# Altium PCB Controlador_Digital.PcbDoc
Units mil, origin at the board's own origin, x right, y up, seen from the top; angles counter-clockwise.
Board outline 2120 x 1800 mil, 2 copper layers (Top Layer, Bottom Layer); 15 components, 14 nets, 48 pads, 0 vias.
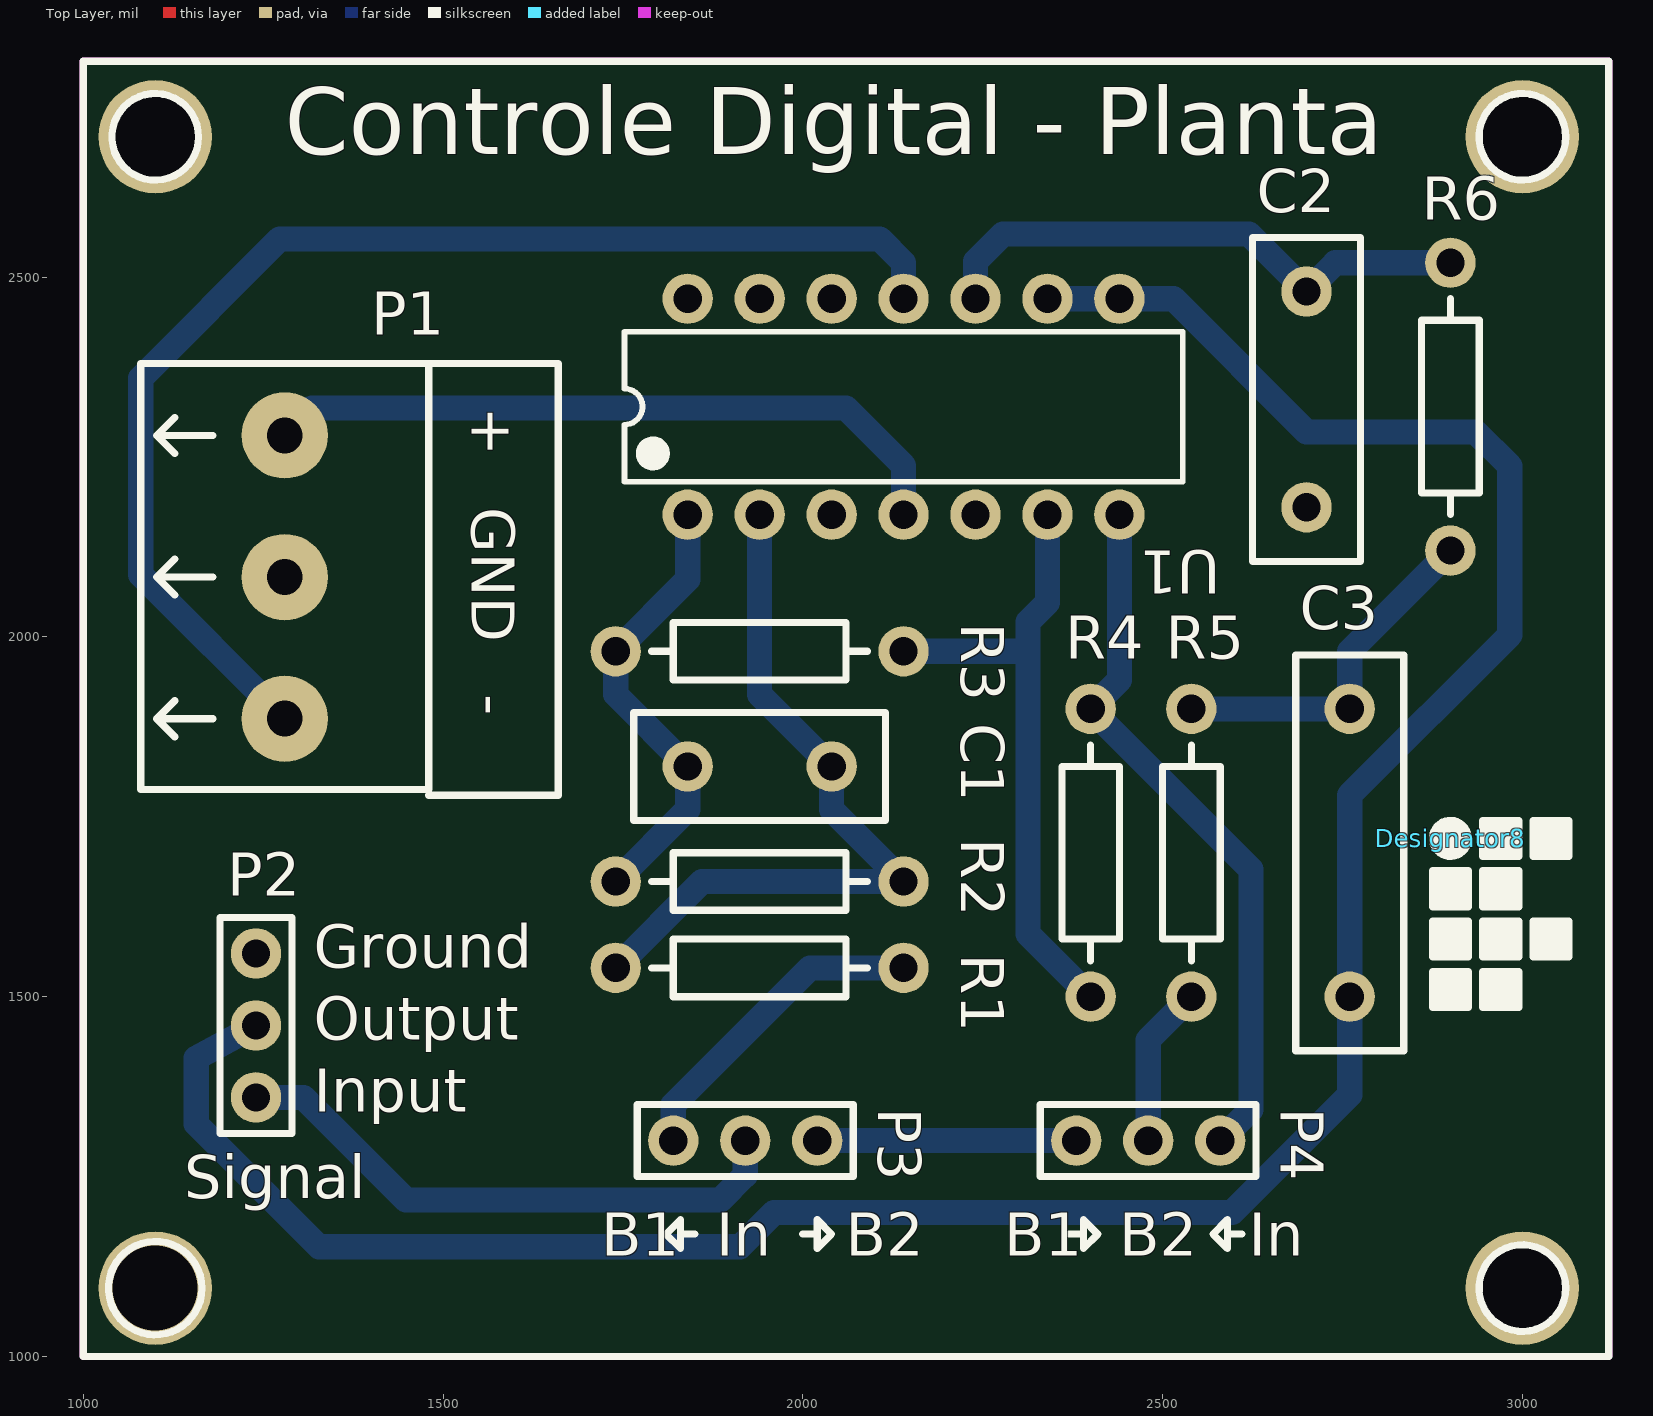
[diagram p0: Top Layer view]
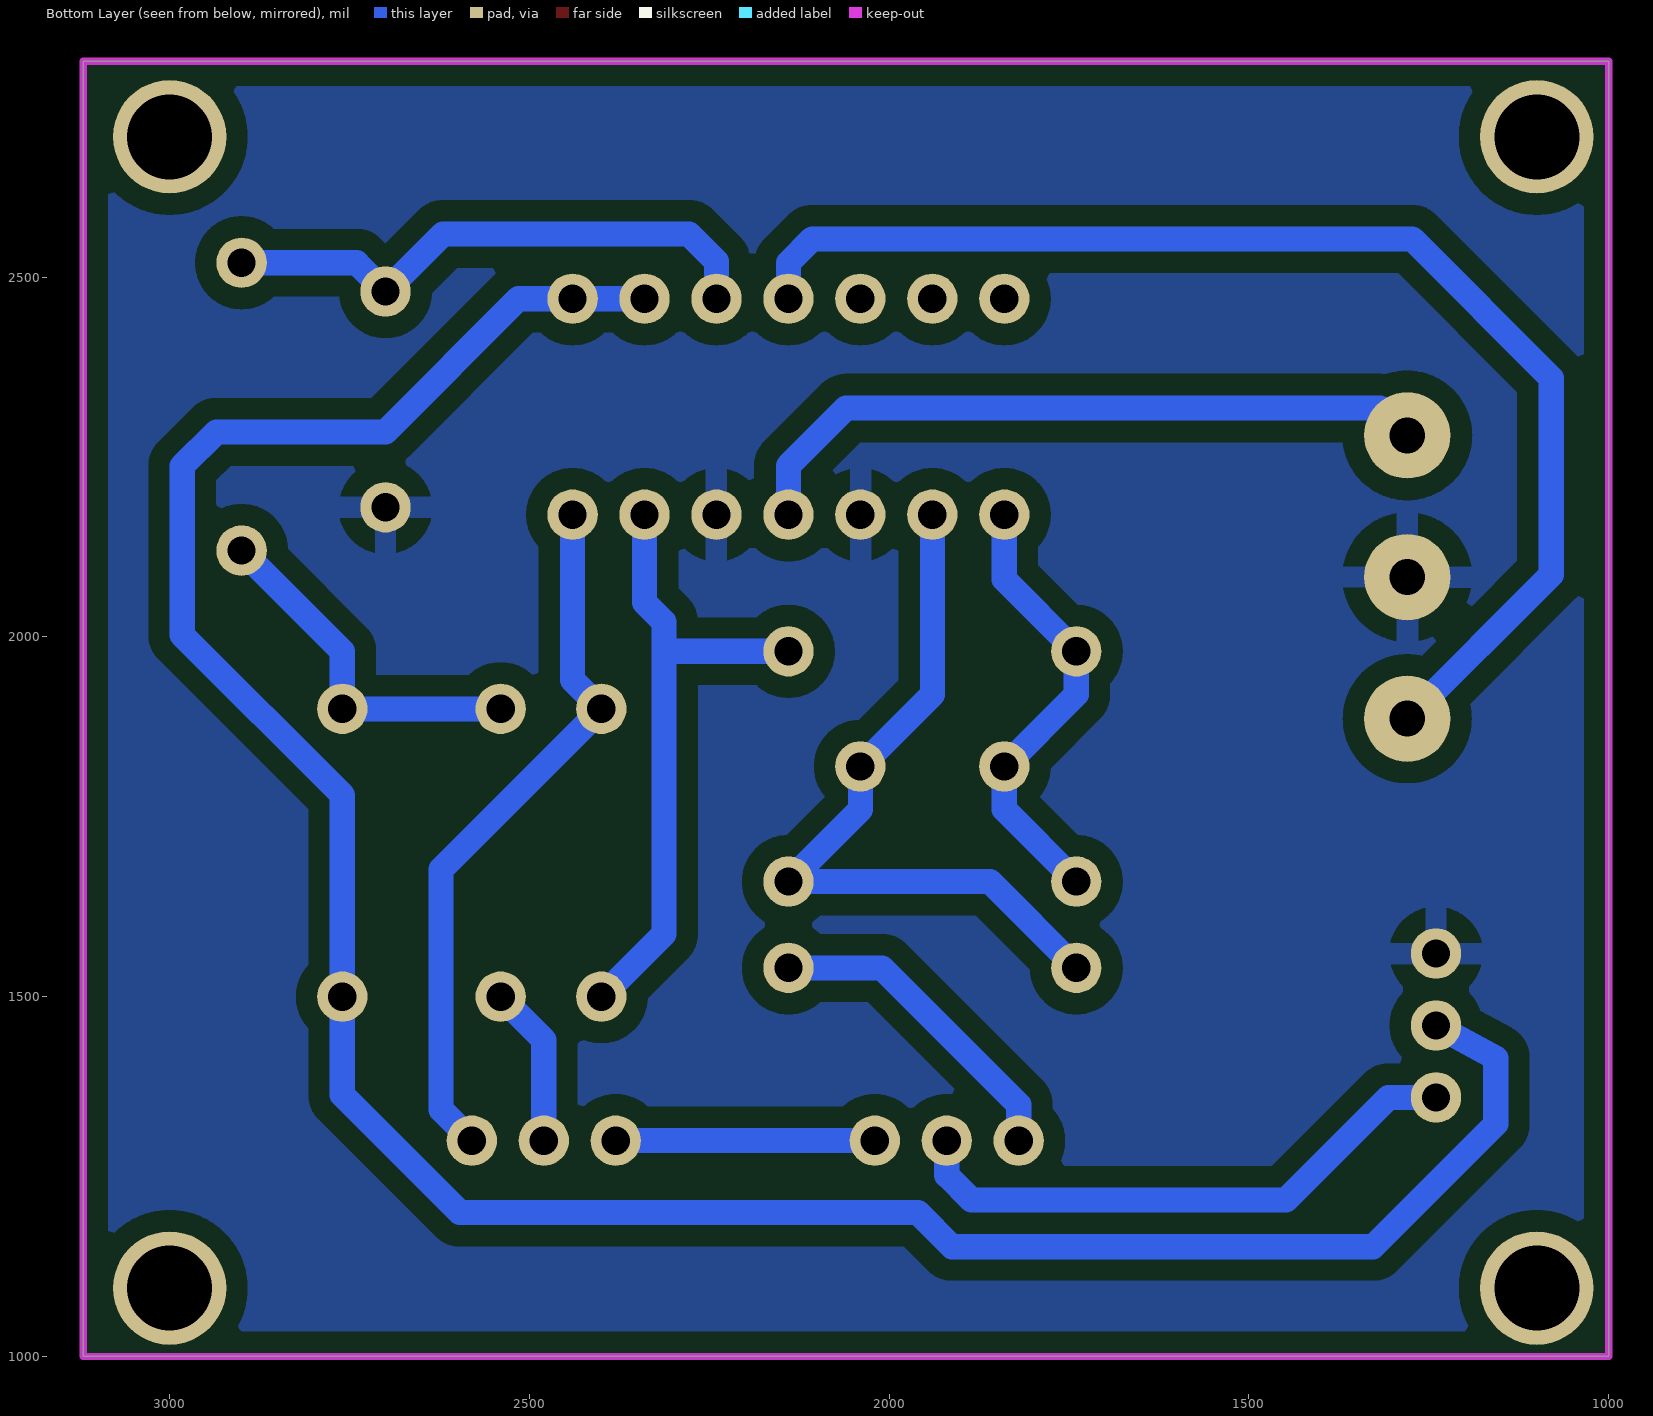
[diagram p1: Bottom Layer view, seen from below]
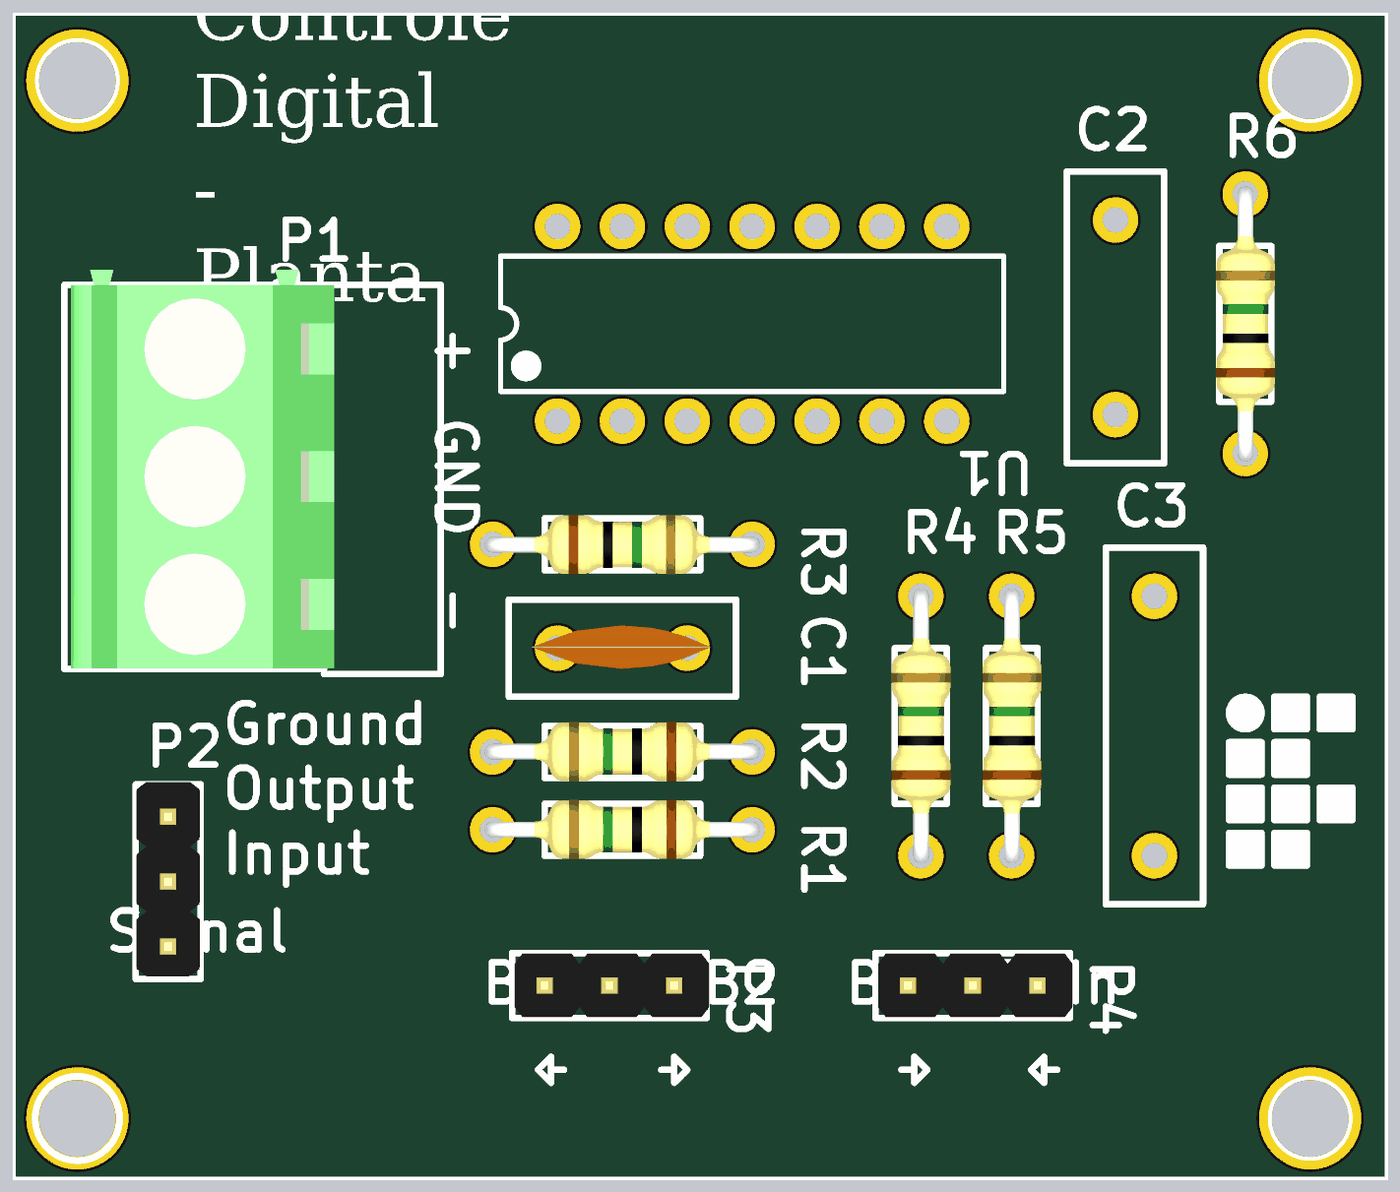
[diagram p2: 3D render of the assembled board from above, using the file's embedded part models]

## Layer stack, top to bottom
Top Solder: solder mask 0.4, Solder Resist, Dk 3.5
Top Layer: signal copper 1.4
Dielectric 1: dielectric 12.6, FR-4, Dk 4.8
Bottom Layer: signal copper 1.4
Bottom Solder: solder mask 0.4, Solder Resist, Dk 3.5

## Board outline
1000,1000 3120,1000 3120,2800 1000,2800

## Design rules (kind name [scope] priority, off if disabled: settings)
Clearance [All] p1: gap=30
PlaneConnect [All] p1: planeconnectstyle=Relief reliefexpansion=30 reliefentries=4 reliefconductorwidth=30 reliefairgap=30
PolygonConnect [All] p1: connectstyle=Relief reliefconductorwidth=30 reliefentries=4 polygonreliefangle="90 Angle" airgapwidth=30
RoutingLayers [All] p1: top layer_v5=FALSE bottom layer_v5=TRUE
RoutingVias [All] p1: holewidth=28 width=50 viastyle="Through Hole" minholewidth=28 minwidth=50 maxholewidth=28 maxwidth=50
SolderMaskExpansion [All] p1: expansion=4
Width [All] p1: maxlimit=35 minlimit=35 preferedwidth=35
28 further rules are at their usual default settings.

## Classes and differential pairs
component class Controlador_Digital: C1 C2 C3 P1 P2 P3 P4 R1 R2 R3 R4 R5 R6 U1

## Components (designator, comment, footprint, x,y, rotation, side; value= is the part's Value field where it differs from the comment)
C1 "150pF" C200-350-150 1840,1820 r0 top
C2 "100nF" C300-450-150 2700,2180 r90 top
C3 "680nF" C400-550-150 2760,1500 r90 top
Designator8 "Comment" IFSC_SILK_SMALL 2900,1720 r0 top
P1 "Terminal" KRE_3 1280,2280 r270 top
P2 "Header_1x3" HDR-M-1x3-2.54mm-180-9.2mm 1240,1360 r90 top
P3 "Header_1x3" HDR-M-1x3-2.54mm-180-9.2mm 1820,1300 r0 top
P4 "Header_1x3" HDR-M-1x3-2.54mm-180-9.2mm 2380,1300 r0 top
R1 "10k" R400-2.0mm 2140,1540 r180 top
R2 "10k" R400-2.0mm 2140,1660 r180 top
R3 "10k" R400-2.0mm 1740,1980 r0 top
R4 "10k" R400-2.0mm 2400,1500 r90 top
R5 "68k" R400-2.0mm 2540,1500 r90 top
R6 "24k" R400-2.0mm 2900,2120 r90 top
U1 "LM324" TI-N14 2140,2320 r90 top

## Footprints (in the part's own frame and the unit in brackets; to place one, negate y for a bottom-side part, rotate by r counter-clockwise, add the part's x,y. Pads: shape width x height; smd on the part's side, far side on the other; paste and mask are expansions set on the pad)
C200-350-150 [mil] "Radial Cap, Thru-Hole; 2 Leads; 0.2 in Pin Spacing"
  round 70 hole 39.37: 1(0,0) 2(200,0)
  silkscreen extent -75,-75 275,75, body extent -40,-32 236,35, height 288
C300-450-150 [mil] "Radial Cap, Thru-Hole; 2 Leads; 0.3 in Pin Spacing"
  round 70 hole 39.37: 1(0,0) 2(300,0)
  silkscreen extent -75,-75 375,75
C400-550-150 [mil] "Radial Cap, Thru-Hole; 2 Leads; 0.4 in Pin Spacing"
  round 70 hole 39.37: 1(0,0) 2(400,0)
  silkscreen extent -75,-75 475,75
HDR-M-1x3-2.54mm-180-9.2mm [mil] "Male Header, 1 line, 3 columns, 180 degrees, 9.2 mm length, 3D ASSMANN WSW components"
  round 70 hole 39.37: 1(0,0) 2(100,0) 3(200,0)
  silkscreen extent -50,-50 250,50, body extent -46,-49 254,49, height 245
IFSC_SILK_SMALL [mil] "IFSC trademark small size"
  silkscreen extent -25,-235 165,25
KRE_3 [mil] "Terminal Block 3 pins"
  round 120 hole 50: 1(0,0) 2(196.85,0) 3(393.7,0)
  silkscreen extent -100,-200 492,200, body extent -123,-190 491,216, height 559
R400-2.0mm [mil] "Axial Device, Thru-Hole; 2 Leads; 0.4 in Pin Spacing"
  round 70 hole 39.37: 1(0,0) 2(400,0)
  silkscreen extent 50,-40 350,40, body extent -12,-46 412,45, height 116
TI-N14 [mil] "DIP, 14-Leads, Body 19.305x6.35 mm, Pitch 2.54 mm"
  round 70 hole 39.37: 1(-150,300) 2(-150,200) 3(-150,100) 4(-150,0) 5(-150,-100) 6(-150,-200) 7(-150,-300) 8(150,-300) 9(150,-200) 10(150,-100) 11(150,0) 12(150,100) 13(150,200) 14(150,300)
  silkscreen extent -104,-388 104,388, body extent -130,-388 130,388, height 200

## Part data
C1 C2 C3: library part Capacitor, "Capacitor"
P1: library part KRE_3, "Terminal Block 1x3"
P2 P3 P4: "Header, 1 Line, 3 Columns, 3 Pins"
R1 R2 R3 R4 R5 R6: library part Resistor, "Resistor"

## Free pads (board coordinates)
  round 157.48 hole 118.11: 0(1100,1095) 0(1100,2695) 0(3000,1095) 0(3000,2695)

## Nets (pads, with @x,y where several pads share a name; then routed paths per layer and width w, separated by ;. In a path a pad name is that pad's centre, name@x,y a point inside that pad or via, vN(x,y) a via of type N, cw(c..) or ccw(c..) an arc to the next point about the centre after c; other vN are vias at no path point)
+12: P1.1 U1.4 | length 976.9
  Bottom Layer w35: P1.1 1318,2318 2060,2318 2140,2238 U1.4
-12: P1.3 U1.11 | length 1760.2
  Bottom Layer w35: P1.3 1080,2086.3 1080,2360 1273,2553 2107,2553 2140,2520 U1.11
GND: C2.1 P1.2 P2.3 U1.3 U1.5
INPUT: P2.1 P3.2 | length 801.4
  Bottom Layer w35: P2.1 1306,1360 1448.5,1217.5 1885.58,1217.5 1920,1251.92 P3.2
NetC1_1: C1.1 R2.2 R3.1 U1.1 | length 634.3
  Bottom Layer w35: R2.2 1840,1760 C1.1 1740,1920 R3.1 1840,2080 U1.1
NetC1_2: C1.2 R1.2 R2.1 U1.2 | length 1042.5
  Bottom Layer w35: R1.2 1860,1660 R2.1 2040,1760 C1.2 1940,1920 U1.2
NetC2_2: C2.2 R6.2 U1.10 | length 777.4
  Bottom Layer w35: U1.10 2240,2522 2278,2560 2620,2560 C2.2 2740,2520 R6.2
NetC3_2: C3.2 R5.2 R6.1 | length 498
  Bottom Layer w35: R5.2 C3.2 2760,1980 R6.1
NetP3_1: P3.1 R1.1 | length 448.7
  Bottom Layer w35: P3.1 1820,1350 2010,1540 R1.1
NetP3_3: P3.3 P4.1 | length 360
  Bottom Layer w35: P3.3 P4.1
NetP4_2: P4.2 R5.1 | length 224.9
  Bottom Layer w35: P4.2 2480,1440 R5.1
NetP4_3: P4.3 R4.2 U1.7 | length 996.7
  Bottom Layer w35: U1.7 2440,1940 R4.2 2623,1677 2623,1343 P4.3
NetR3_2: R3.2 R4.1 U1.6 | length 890.2
  Bottom Layer w35: R3.2 2313,1980 ; U1.6 2340,2048 2313,2021 2313,1980 ; R4.1 2313,1587 2313,1980
OUTPUT: C3.1 P2.2 U1.8 U1.9 | length 3652.5
  Bottom Layer w35: P2.2 1157,1415 1157,1323 1327.5,1152.5 1912.5,1152.5 1960,1200 2596.67,1200 2760,1363.33 C3.1 2760,1780 2982.5,2002.5 2982.5,2237.5 2935,2285 2700,2285 2515,2470 U1.8 U1.9
pads on no net: U1.12 U1.13 U1.14

## Polygon pours and split planes (outlines as drawn)
GND on Bottom Layer "gnd" (solid, remove dead copper, pour order 0): 1000,2800 3120,2800 3120,1000 1000,1000

## Keep-outs
Keep-Out Layer:
  the board outline again, w10

## Silkscreen, mask and mechanical layers (free items; w line width, h text height)
Top Overlay:
  circle w10: c3000,1095 r60.21
  circle w10: c3000,2695 r60.21
  circle w10: c1100,2695 r60.21
  circle w10: c1100,1095 r65
  lines w10: 1470,2380 1660,2380 1660,1780 1480,1780 ; 1830,1170 1850,1170 ; 2000,1170 2020,1170 ; 2370,1170 2390,1170 ; 2590,1170 2610,1170 ; 1000,1000 1000,2800 3120,2800 3120,1000 1000,1000 ; 1810,1170 1830,1190 1830,1150 1810,1170 ; 2020,1150 2020,1190 2040,1170 2020,1150 ; 2390,1150 2410,1170 2390,1190 2390,1150 ; 2570,1170 2590,1150 2590,1190 2570,1170
  text "Controle Digital - Planta" at 1280,2640 h160
  text "+" at 1540,2320 h60 r270
  text "GND" at 1540,2180 h60 r270
  text "-" at 1540,1920 h60 r270
  text "Ground" at 1320,1540 h60
  text "Output" at 1320,1440 h60
  text "Input" at 1320,1340 h60
  text "Signal" at 1140,1220 h60
  text "B1" at 1720,1140 h60
  text "In" at 1880,1140 h60
  text "B2" at 2060,1140 h60
  text "B1" at 2280,1140 h60
  text "B2" at 2440,1140 h60
  text "In" at 2620,1140 h60